# Altium PCB PCB1.PcbDoc
Units mm, origin at the board's own origin, x right, y up, seen from the top; angles counter-clockwise.
Board outline 89.79 x 46.86 mm, 2 copper layers (Top Layer, Bottom Layer); 32 components, 21 nets, 101 pads, 26 vias.
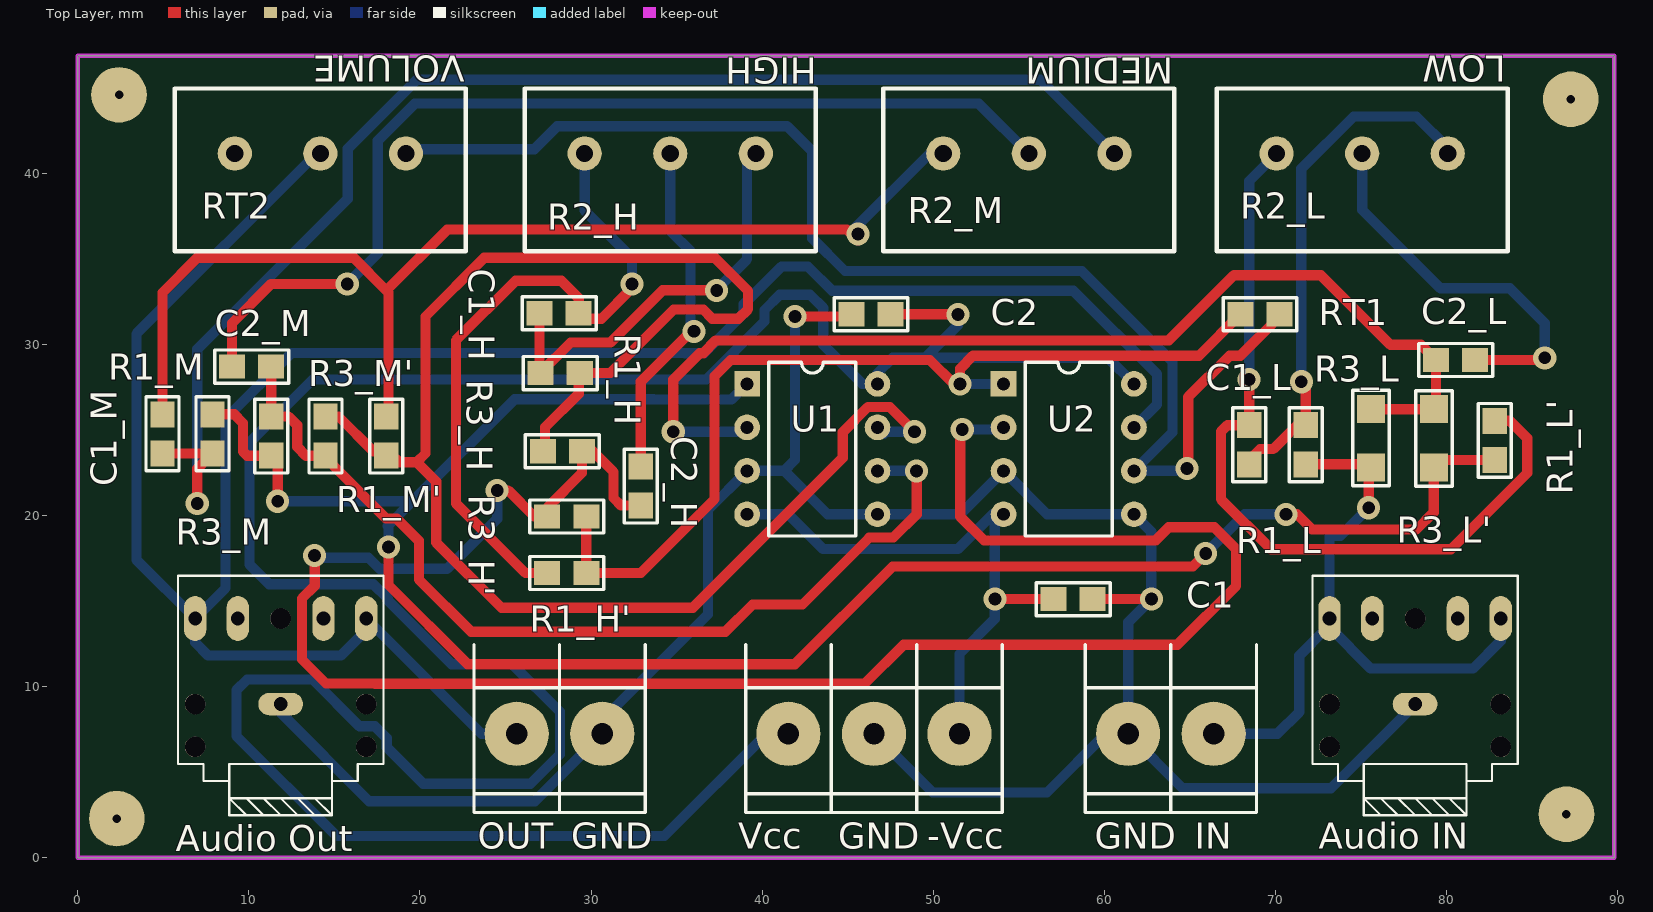
[diagram p0: Top Layer view]
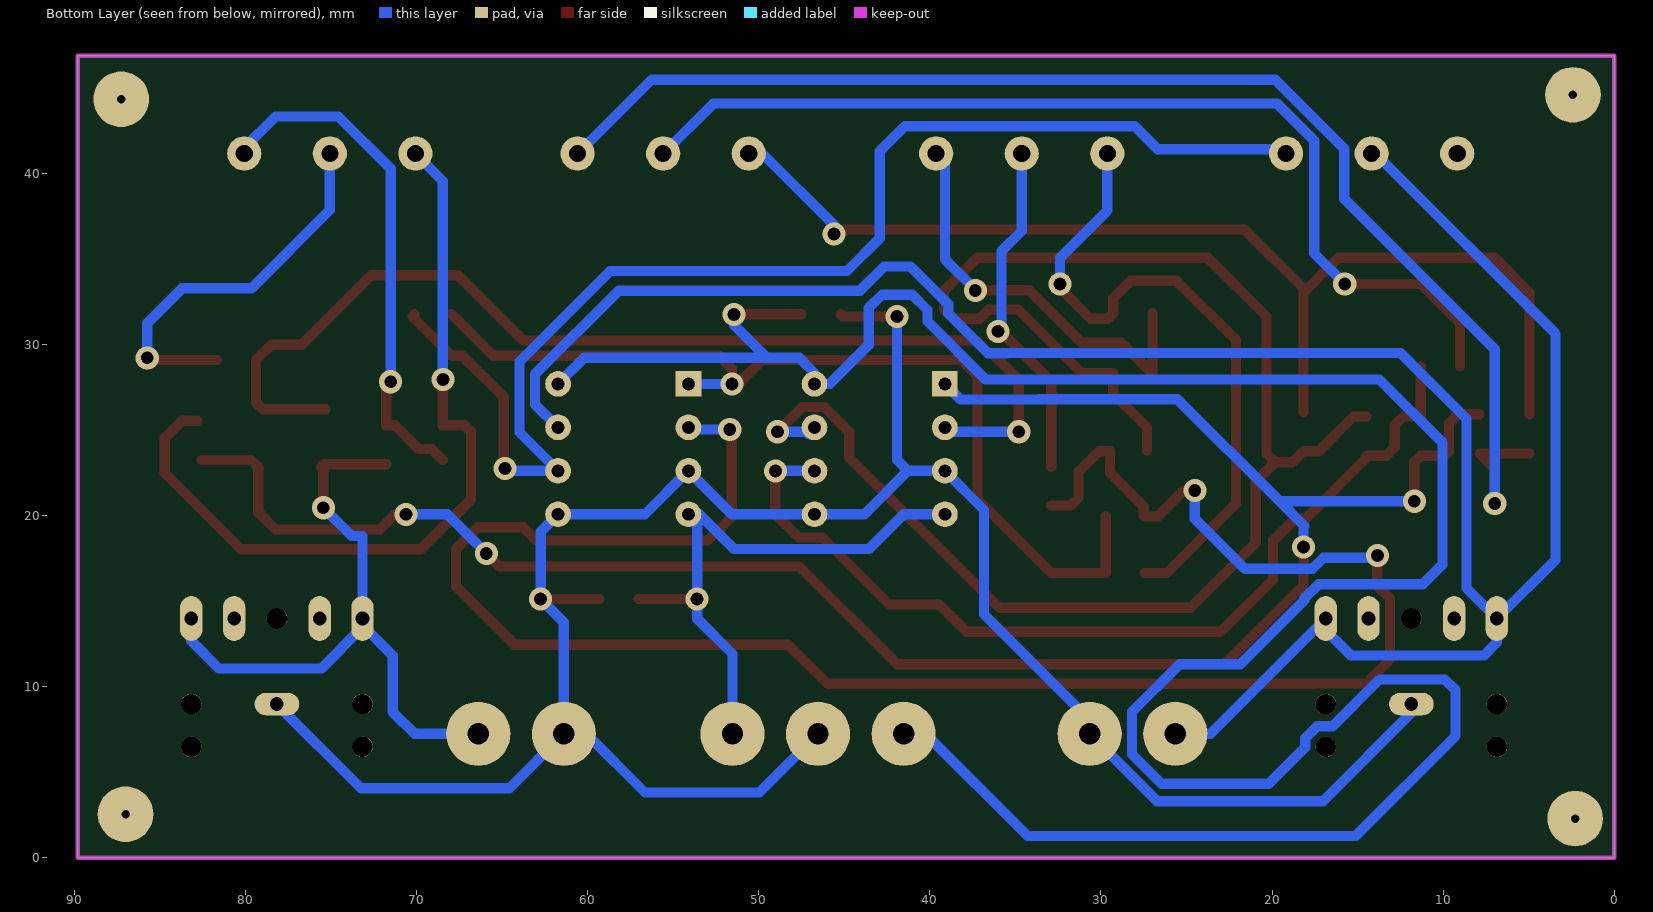
[diagram p1: Bottom Layer view, seen from below]
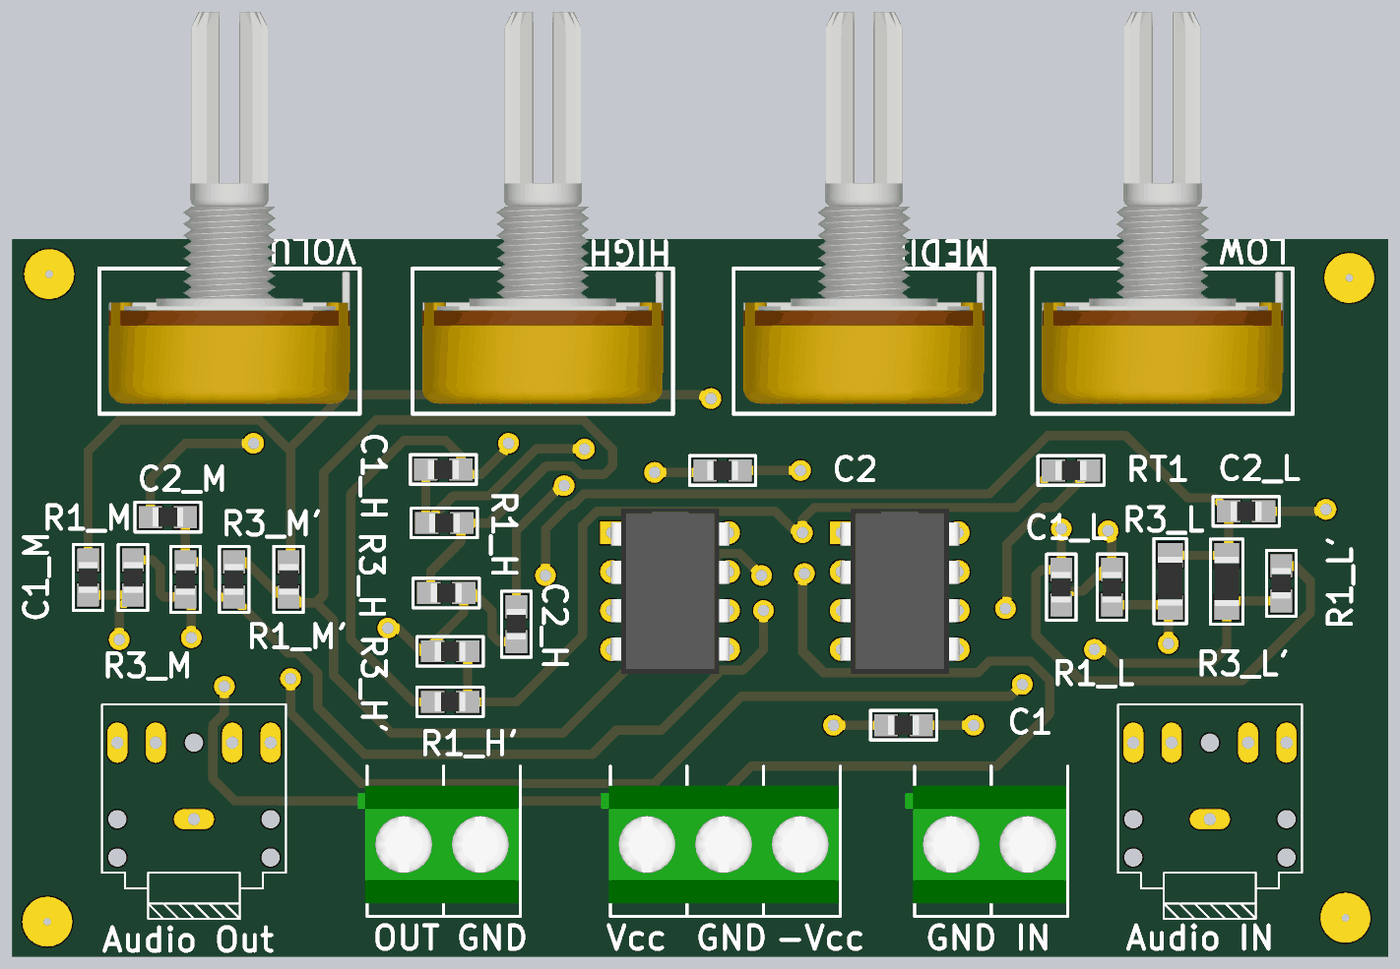
[diagram p2: 3D render of the assembled board from above, using the file's embedded part models]

## Layer stack, top to bottom
Top Solder: solder mask 0.0102, Solder Resist, Dk 3.5
Top Layer: signal copper 0.0356
Dielectric 1: dielectric 0.32, FR-4, Dk 4.8
Bottom Layer: signal copper 0.0356
Bottom Solder: solder mask 0.0102, Solder Resist, Dk 3.5

## Board outline
0,0 0,46.863 89.789,46.863 89.789,0

## Design rules (kind name [scope] priority, off if disabled: settings)
Clearance [All] p1: gap=0.3 ignorepadtopadclearanceinfootprint=FALSE
PolygonConnect [All] p1: connectstyle=Relief reliefconductorwidth=0.254 reliefentries=4 polygonreliefangle="90 Angle" airgapwidth=0.254
RoutingVias [All] p1: holewidth=0.7 width=2 viastyle="Through Hole" minholewidth=0.7 minwidth=2 maxholewidth=0.7 maxwidth=2
SolderMaskExpansion [All] p1: expansion=0.102
Width [All] p1: maxlimit=0.6 minlimit=0.6 preferedwidth=0.6
30 further rules are at their usual default settings.

## Components (designator, comment, footprint, x,y, rotation, side; value= is the part's Value field where it differs from the comment)
-Vcc "VCC" BORNERA3 46.529,7.239 r90 top (schematic designator VCC)
"Audio IN" "FC68131" *FC68131-5P 78.152,13.977 r90 top
"Audio Out" "FC68131" *FC68131-5P 11.858,13.977 r90 top
C1 "100n" 0805 58.166,15.113 r0 top
C1_H "56" 0805 28.13,31.813 r0 top
C1_L "68n" 0805 68.453,24.13 r90 top
C1_M "47n" 0805 4.953,24.765 r90 top
C2 "100n" 0805 46.355,31.75 r180 top
C2_H "5.6n" 0805 32.893,21.717 r270 top
C2_L "6.8n" 0805 80.518,29.083 r180 top
C2_M "4.7n" 0805 10.16,28.702 r0 top
IN "IN" BORNERA2 63.881,7.239 r90 top
OUT "OUT" BORNERA2 28.154,7.239 r90 top
R1_H "100" 0805 28.194,28.321 r180 top
R1_H' "100" 0805 28.575,16.637 r0 top
R1_L "10k" 0805 71.755,24.13 r90 top
R1_L' "10k" 0805 82.804,24.384 r270 top
R1_M "1k" 0805 7.874,24.765 r270 top
R1_M' "1k" 0805 18.034,24.638 r270 top
R2_H "1k" POTENCIOMETRO 34.624,41.148 r180 top
R2_L "100k" POTENCIOMETRO 75.057,41.148 r180 top
R2_M "10k" POTENCIOMETRO 55.579,41.148 r180 top
R3_H "10k" 0805 28.321,23.749 r0 top
R3_H' "10k" 0805 28.575,19.939 r0 top
R3_L "1M" 1206 75.565,24.511 r90 top
R3_L' "1M" 1206 79.248,24.511 r270 top
R3_M "100k" 0805 11.303,24.638 r90 top
R3_M' "100k" 0805 14.478,24.638 r90 top
RT1 "51k" 0805 69.088,31.75 r0 top
RT2 "100k" POTENCIOMETRO 14.177,41.148 r180 top
U1 "LM833" DIP8 39.116,27.686 r0 top
U2 "LM833" DIP8 54.102,27.686 r0 top

## Footprints (in the part's own frame and the unit in brackets; to place one, negate y for a bottom-side part, rotate by r counter-clockwise, add the part's x,y. Pads: shape width x height; smd on the part's side, far side on the other; paste and mask are expansions set on the pad)
0805 [mil] "Pasivo 0805"
  rect 60x56 smd: 1(-45,0) 2(45,0)
  silkscreen extent -85,-38 85,38, body extent -40,-24 39,25, height 15
1206 [mil] "Pasivo 1206"
  rect 64x64 smd: 1(-67,0) 2(67,0)
  silkscreen extent -109,-42 110,42, body extent -62,-32 63,31, height 20
*FC68131-5P [mm]
  oval 1.308x2.616 hole 0.8: 1(-5,0)
  oval 2.616x1.308 hole 0.8: 2(0,-5) 3(0,-2.5) 4(0,2.5) 5(0,5)
  round 1.2 hole 1.2 unplated: None(-7.5,-5) None(-7.5,5) None(-5,-5) None(-5,5) None(0,0)
  silkscreen extent -11.5,-6 2.5,6
BORNERA2 [mm] "Bornera con Tornillos 5mm separación"
  round 3.75 hole 1.25: 1(0,2.5) 2(0,-2.5)
  silkscreen extent -4.6,-5 5.2,5, body extent -3.76,-4.89 3.94,5.61, height 10
BORNERA3 [mm] "Bornera con Tornillos 5mm separación"
  round 3.75 hole 1.25: 1(0,5) 2(0,0) 3(0,-5)
  silkscreen extent -4.6,-7.5 5.2,7.5, body extent -3.76,-7.39 3.94,8.11, height 10.05
DIP8 [mm]
  rect 1.5x1.5 hole 0.75: 1(0,0)
  round 1.5 hole 0.75: 2(0,-2.54) 3(0,-5.08) 4(0,-7.62) 5(7.62,-7.62) 6(7.62,-5.08) 7(7.62,-2.54) 8(7.62,0)
  silkscreen extent 1.27,-8.89 6.35,1.27, body extent -0.06,-9.21 7.7,1.59, height 4.5
POTENCIOMETRO [mm]
  round 2 hole 1: 1(-5,0) 2(0,0) 3(5,0)
  silkscreen extent -8.5,-3.8 8.5,5.7, body extent -7.87,-20.53 7.87,5.03, height 20.12

## Part data
-Vcc: library part "BORNERA 3"
"Audio IN" "Audio Out": "Stereo Jack, 3.5mm, 3pos, Pcb", Package=None, Availability=Unavailable, MF=Cliff, MP=FC68131, Price=None, SnapEDA_Link=https://www.snapeda.com/parts/FC68131/Cliff%20Electronics/view-part/?ref=snap
C1 C1_H C1_L C1_M C2 C2_H C2_L C2_M: library part CAP
IN OUT: library part "BORNERA 2"
R1_H R1_H' R1_L R1_L' R1_M R1_M' R3_H R3_H' R3_L R3_L' R3_M R3_M' RT1: library part RES
R2_H R2_L R2_M RT2: library part POTENCIOMETRO
U1 U2: "Dual Audio Operational Amplifier"

## Free pads (board coordinates)
  round 3.25 hole 0.5: 6(2.413,44.577) 7(87.249,44.323) 8(86.995,2.54) 9(2.286,2.286)

## Via types
v1: diameter 1.35, hole 0.75, Top Layer to Bottom Layer, 26 vias

## Nets (pads, with @x,y where several pads share a name; then routed paths per layer and width w, separated by ;. In a path a pad name is that pad's centre, name@x,y a point inside that pad or via, vN(x,y) a via of type N, cw(c..) or ccw(c..) an arc to the next point about the centre after c; other vN are vias at no path point)
-VCC: -Vcc.1 C2.1 U1.8 U2.8 | length 161.9
  Top Layer w0.6: C2.1 v1(51.435,31.75)
  Bottom Layer w0.6: -Vcc.1 40.259,7.239 34.29,1.27 15.113,1.27 9.271,7.112 9.271,9.779 9.906,10.414 13.724,10.414 16.461,7.677 17.355,7.677 18.058,6.974 18.058,6.453 20.193,4.318 26.46,4.318 28.179,6.037 28.179,8.524 25.4,11.303 21.844,11.303 18.112,15.035 18.112,15.15 17.276,15.986 11.192,15.986 10.033,17.145 10.033,24.257 13.716,27.94 36.731,27.94 40.132,31.341 40.132,32.004 41.026,32.898 42.788,32.898 43.561,32.125 43.561,29.972 45.847,27.686 U1.8 46.736,28.321 47.625,29.21 49.53,29.21 ; v1(51.435,31.75) 51.435,31.115 49.53,29.21 ; U2.8 60.198,29.21 49.53,29.21
GND: "Audio IN.1" "Audio Out.1" -Vcc.2 C1.2 C2.2 IN.1 OUT.2 U1.3 U1.5 U2.3 U2.5 | length 135.4
  Top Layer w0.6: v1(41.91,31.623) 45.085,31.623 C2.2 ; C1.2 v1(62.738,15.113)
  Bottom Layer w0.6: 11.858,8.977 11.858,8.462 17.018,3.302 26.717,3.302 OUT.2 30.654,8.048 36.83,14.224 36.83,20.32 U1.3 41.275,22.606 ; v1(41.91,31.623) 41.91,23.241 41.275,22.606 ; -Vcc.2 49.958,3.81 56.642,3.81 60.071,7.239 IN.1 ; 78.152,8.977 73.239,4.064 64.556,4.064 IN.1 ; 41.275,22.606 43.815,20.066 U1.5 51.562,20.066 U2.3 56.642,20.066 U2.5 62.738,19.05 v1(62.738,15.113) 61.381,13.756 IN.1
NetC1_H_1: C1_H.1 R1_H.2 R2_H.1 | length 24.8
  Top Layer w0.6: R1_H.2@26.987,28.321 C1_H.1 ; R1_H.2 27.051,28.357 28.793,30.099 31.115,30.099 34.181,33.165 37.32,33.165 v1(37.338,33.147)
  Bottom Layer w0.6: v1(37.338,33.147) 37.338,33.203 39.116,34.981 39.116,40.64 R2_H.1
NetC1_H_2: C1_H.2 R1_H'.1 R2_H.3 | length 39.5
  Top Layer w0.6: R1_H'.1 26.162,16.637 22.098,20.701 22.098,30.226 25.59,33.718 28.258,33.718 29.273,32.703 C1_H.2 29.591,31.496 30.607,31.496 32.385,33.274 v1(32.385,33.528)
  Bottom Layer w0.6: R2_H.3 29.624,37.813 32.385,35.052 v1(32.385,33.528)
NetC1_L_1: C1_L.1 R1_L.2 R2_L.1 | length 29.8
  Top Layer w0.6: C1_L.1@68.453,23.241 69.088,23.876 69.85,23.876 71.247,25.273 R1_L.2 v1@71.755,27.559
  Bottom Layer w0.6: v1(71.501,27.813) 71.501,40.259 74.549,43.307 78.232,43.307 80.057,41.482 R2_L.1
NetC1_L_2: C1_L.2 R1_L'.1 R2_L.3 | length 47.2
  Top Layer w0.6: v1@68.453,27.559 C1_L.2 67.183,25.273 66.802,24.892 66.802,20.955 69.739,18.018 80.248,18.018 84.709,22.479 84.709,24.511 83.693,25.527 R1_L'.1
  Bottom Layer w0.6: v1(68.453,27.94) 68.453,39.544 R2_L.3
NetC1_M_1: C1_M.1 R1_M.2 R2_M.1 | length 78.8
  Top Layer w0.6: C1_M.1 R1_M.2 6.985,22.733 v1(6.985,20.701)
  Bottom Layer w0.6: v1(6.985,20.701) 6.985,29.718 15.777,38.51 15.777,41.431 19.812,45.466 56.261,45.466 R2_M.1
NetC1_M_2: C1_M.2 R1_M'.1 R2_M.3 | length 66
  Top Layer w0.6: C1_M.2 4.953,33.02 6.985,35.052 16.129,35.052 18.034,33.147 ; R1_M'.1@18.161,26.035 18.161,33.02 18.034,33.147 ; v1(45.593,36.449) 45.593,36.068 44.958,36.703 21.59,36.703 18.034,33.147
  Bottom Layer w0.6: v1(45.593,36.449) 45.593,36.703 45.466,36.83 49.784,41.148 R2_M.3
NetC2_H_1: C2_H.1 R2_H.2 | length 20.5
  Top Layer w0.6: C2_H.1 32.893,27.813 35.814,30.734 v1@35.79,30.758 ; v1@35.687,30.861 v1@35.79,30.758 ; v1(36.018,30.758) v1@35.79,30.758
  Bottom Layer w0.6: R2_H.2 34.624,36.623 35.814,35.433 35.814,31.242 36.018,31.038 v1(36.018,30.758)
NetC2_H_2: C2_H.2 R3_H'.1 R3_H.2 U2.2 | length 118
  Top Layer w0.6: v1(13.843,17.653) 13.843,15.889 13.104,15.15 13.104,11.58 14.507,10.177 17.355,10.177 17.372,10.16 45.974,10.16 48.26,12.446 64.262,12.446 67.691,15.875 67.691,18.034 66.421,19.304 63.754,19.304 62.992,18.542 52.959,18.542 51.567,19.934 v1@51.567,24.638 ; v1@24.765,21.463 25.146,21.463 26.67,19.939 R3_H'.1 ; R3_H'.1@27.495,20.002 27.495,20.511 29.464,22.479 R3_H.2 30.099,23.749 31.305,22.543 31.305,21.018 31.75,20.574 C2_H.2
  Bottom Layer w0.6: v1@13.97,17.526 16.993,17.526 17.633,16.886 21.585,16.886 24.511,19.812 v1(24.511,21.463) ; v1(51.689,25.019) 53.975,25.019 U2.2
NetC2_L_1: C2_L.1 R2_L.2 | length 22.9
  Top Layer w0.6: C2_L.1 85.598,29.083 v1(85.725,29.21)
  Bottom Layer w0.6: R2_L.2 75.057,37.846 79.629,33.274 83.693,33.274 85.725,31.242 v1(85.725,29.21)
NetC2_L_2: C2_L.2 R3_L'.1 R3_L.2 U1.2 | length 63
  Top Layer w0.6: v1(34.798,24.892) 34.798,27.94 36.341,29.483 36.547,29.483 37.289,30.226 63.754,30.226 67.564,34.036 72.644,34.036 76.708,29.972 78.486,29.972 C2_L.2 79.375,26.594 R3_L'.1@79.248,26.467 ; R3_L.2@75.311,26.213 R3_L.2 R3_L'.1@78.994,26.213
  Bottom Layer w0.6: v1(34.798,24.892) 38.481,24.892 38.798,25.209 U1.2@38.989,25.019
NetC2_M_1: C2_M.1 R2_M.2 | length 59.5
  Top Layer w0.6: C2_M.1 9.017,31.242 11.303,33.528 v1(15.748,33.528)
  Bottom Layer w0.6: v1(15.748,33.528) 17.526,35.306 17.526,41.907 19.688,44.069 52.658,44.069 R2_M.2
NetC2_M_2: C2_M.2 R3_M'.1 R3_M.2 U1.6 | length 55.6
  Top Layer w0.6: C2_M.2 R3_M.2 12.319,25.781 12.827,25.273 12.827,24.003 13.335,23.495 R3_M'.1@14.351,23.495 ; R3_M'.1 14.478,23.368 18.029,19.817 18.64,19.817 19.939,18.518 19.939,16.256 22.987,13.208 37.846,13.208 39.433,14.795 42.355,14.795 46.239,18.68 46.239,18.716 47.672,18.716 49.022,20.066 v1(49.022,22.606)
  Bottom Layer w0.6: U1.6 v1(49.022,22.606)
NetRT1_2: RT1.2 RT2.1 U2.6 | length 76.3
  Top Layer w0.6: v1(64.812,22.733) 64.897,23.241 64.897,26.924 67.31,29.337 67.945,29.337 70.231,31.623 RT1.2@70.104,31.75
  Bottom Layer w0.6: RT2.1 19.431,41.402 26.67,41.402 28.016,42.748 41.453,42.748 42.926,41.275 42.926,36.195 44.836,34.285 58.679,34.285 63.972,28.992 63.972,24.856 U2.6 64.685,22.606 v1(64.812,22.733)
V1: R1_L'.2 R1_M.1 R3_L'.2 R3_M.1 U1.1 | length 117.6
  Top Layer w0.6: R1_M.1 9.144,25.908 9.652,25.4 9.652,23.749 9.906,23.495 R3_M.1 11.684,23.114 v1(11.684,20.828) ; v1(18.161,18.161) 18.161,15.934 22.792,11.303 41.91,11.303 47.625,17.018 65.151,17.018 v1(65.913,17.78) ; v1(70.612,20.066) 71.247,20.066 72.136,19.177 74.905,19.177 74.91,19.172 75.966,19.172 75.971,19.177 78.232,19.177 79.248,20.193 R3_L'.2 79.68,23.241 R1_L'.2@82.55,23.241
  Bottom Layer w0.6: v1(11.684,20.828) 19.558,20.828 ; v1(18.161,18.161) 18.161,19.333 18.112,19.382 19.558,20.828 ; U1.1 38.2,26.77 33.651,26.77 33.624,26.797 25.527,26.797 19.558,20.828 ; v1(65.913,17.78) 68.199,20.066 v1(70.612,20.066)
V2: R1_H.1 R1_M'.2 R3_H.1 R3_M'.2 U1.7 | length 97.8
  Top Layer w0.6: R3_M'.2 15.24,25.781 17.272,23.749 18.161,23.749 18.796,23.114 19.812,23.114 ; R3_H.1@27.305,23.812 27.305,25.146 29.273,27.114 R1_H.1@29.273,28.321 ; R1_H.1 31.115,28.321 34.827,32.033 36.547,32.033 37.084,31.496 38.608,31.496 39.172,32.06 39.172,33.116 37.236,35.052 23.749,35.052 20.32,31.623 20.32,23.622 19.812,23.114 ; v1(48.895,24.892) 47.451,26.336 46.177,26.336 44.704,24.863 44.704,23.368 35.941,14.605 24.765,14.605 20.955,18.415 20.955,21.971 19.812,23.114
  Bottom Layer w0.6: U1.7 47.117,24.765 47.244,24.892 v1(48.895,24.892)
V4: R1_H'.2 R3_H'.2 RT1.1 U2.1 | length 56.2
  Top Layer w0.6: R3_H'.2 R1_H'.2 32.893,16.637 37.211,20.955 37.211,28.13 38.164,29.083 49.787,29.083 51.184,27.686 v1(51.562,27.686) 51.562,28.575 52.313,29.326 65.521,29.326 RT1.1
  Bottom Layer w0.6: v1(51.562,27.686) U2.1
VCC: -Vcc.3 C1.1 U1.4 U2.4 | length 34
  Top Layer w0.6: v1(53.594,15.113) C1.1
  Bottom Layer w0.6: U1.4 41.529,20.066 43.561,18.034 51.435,18.034 53.467,20.066 U2.4 53.594,19.558 v1(53.594,15.113) 53.594,13.97 51.529,11.905 -Vcc.3
Vin: "Audio IN.2" "Audio IN.5" IN.2 R1_L.1 R3_L.1 | length 38.6
  Top Layer w0.6: R1_L.1 R3_L.1@75.438,22.987 ; v1(75.438,20.447) 75.438,22.682 R3_L.1
  Bottom Layer w0.6: IN.2 70.104,7.239 71.374,8.509 71.374,11.811 72.898,13.335 73.152,13.335 ; v1(75.438,20.447) 73.787,18.796 73.152,18.796 73.152,13.977 73.152,13.462 75.565,11.049 81.534,11.049 83.152,12.667 83.152,13.977
Vout: "Audio Out.2" "Audio Out.5" OUT.1 RT2.2 U2.7 | length 134.9
  Bottom Layer w0.6: RT2.2 13.97,41.148 3.429,30.607 3.429,17.406 6.858,13.977 ; OUT.1 23.596,7.239 16.858,13.977 16.858,13.302 15.367,11.811 7.62,11.811 6.858,12.573 6.858,13.977 ; U2.7 63.072,26.496 63.072,28.245 58.181,33.136 44.08,33.136 42.672,34.544 41.12,34.544 39.629,33.053 38.912,32.335 38.912,31.8 36.595,29.483 35.49,29.483 35.488,29.486 12.468,29.486 8.636,25.654 8.636,15.755 6.858,13.977
pads on no net: "Audio IN.3" "Audio IN.4" "Audio IN.None" "Audio Out.3" "Audio Out.4" "Audio Out.None" RT2.3

## Keep-outs
Keep-Out Layer:
  the board outline again, w0.254

## Silkscreen, mask and mechanical layers (free items; w line width, h text height)
Top Overlay:
  text "VOLUME" at 22.606,46.863 h1.52 r180
  text "LOW" at 83.439,46.863 h1.52 r180
  text "HIGH" at 43.18,46.736 h1.52 r180
  text "MEDIUM" at 64.008,46.736 h1.52 r180
  text "GND" at 28.829,0.508 h1.52
  text "Vcc" at 38.608,0.508 h1.52
  text "GND" at 44.45,0.508 h1.52
  text "GND" at 59.436,0.508 h1.52